# EAGLE board transceiver (2) - Copy (EAGLE 6.4), part 1 of 2
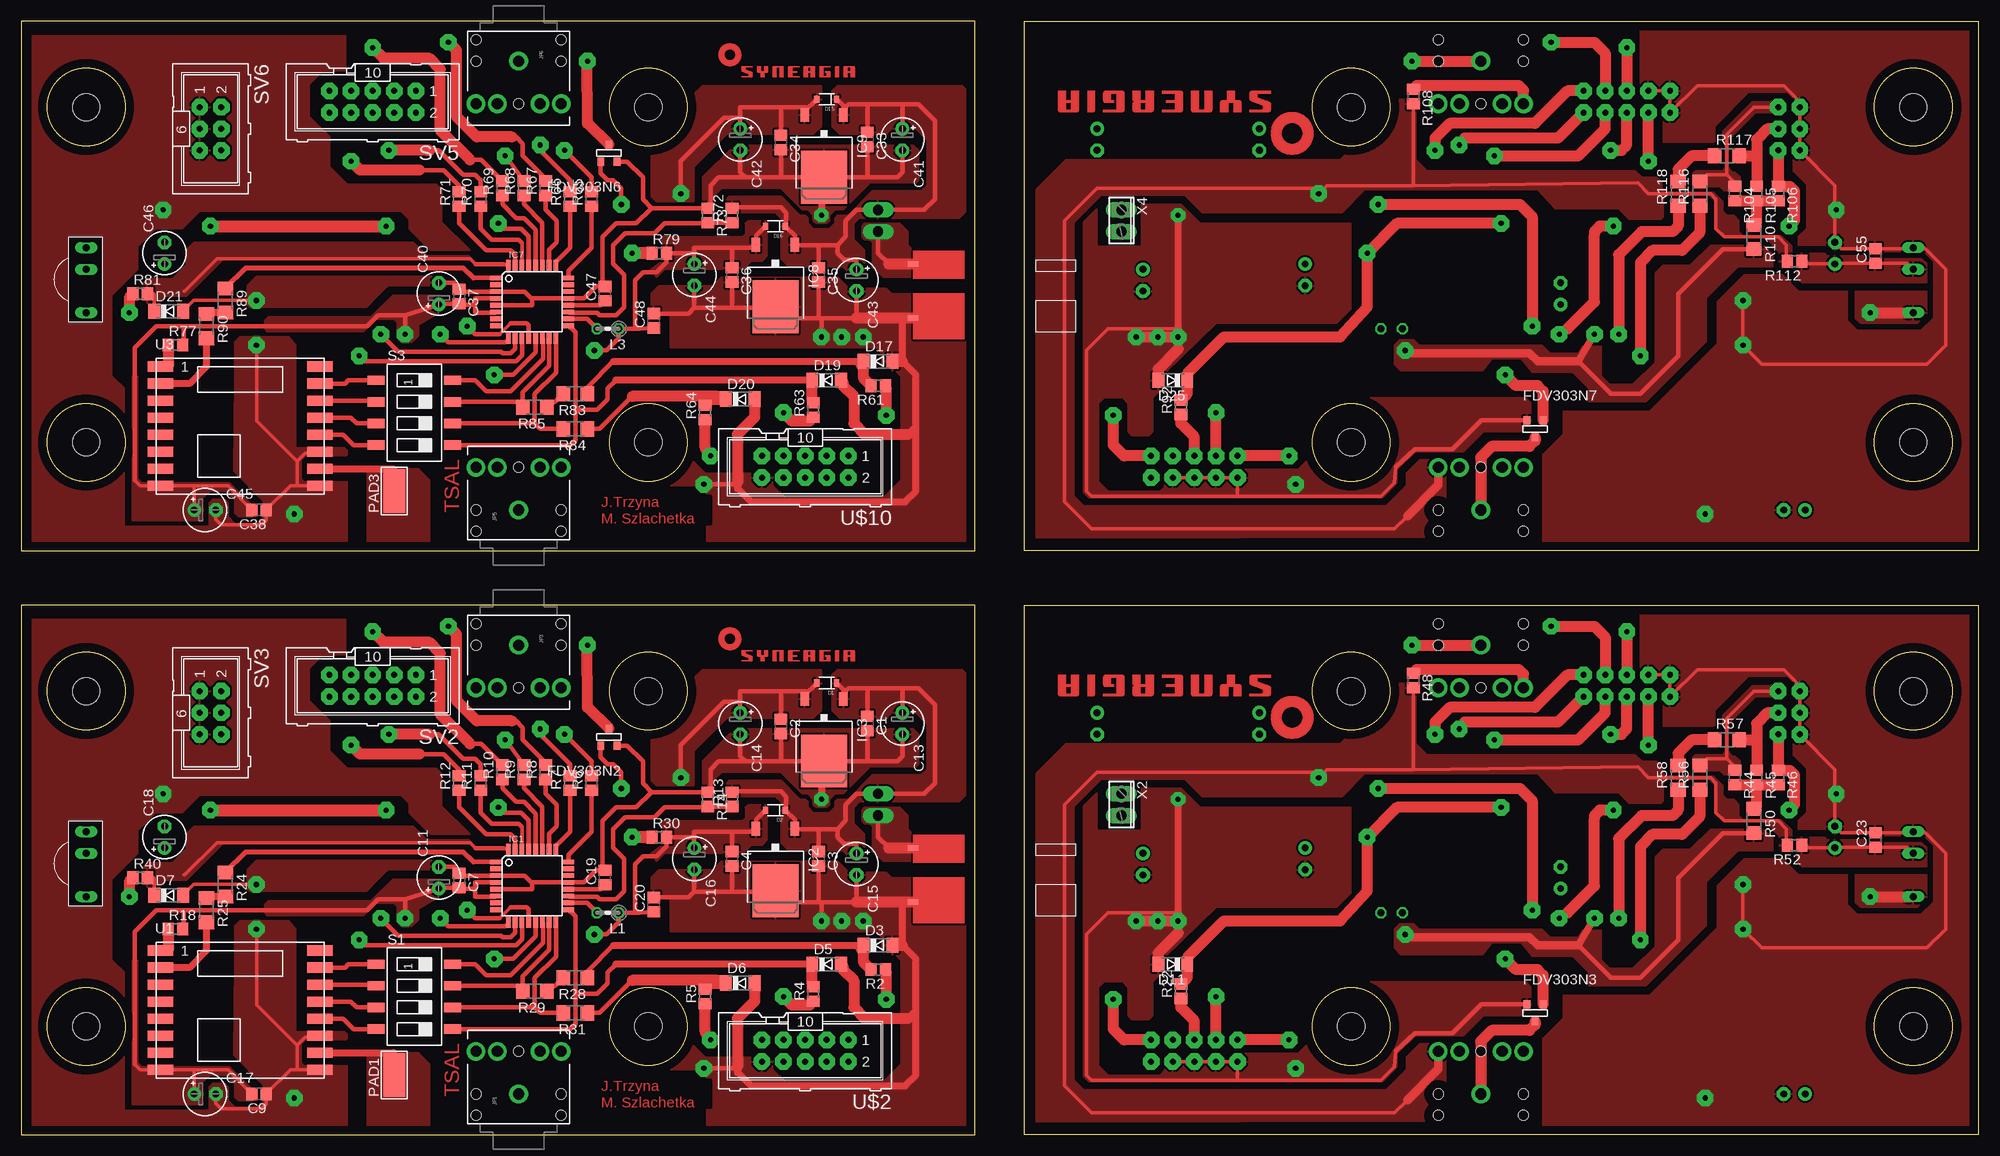
[diagram p0: board, top side]
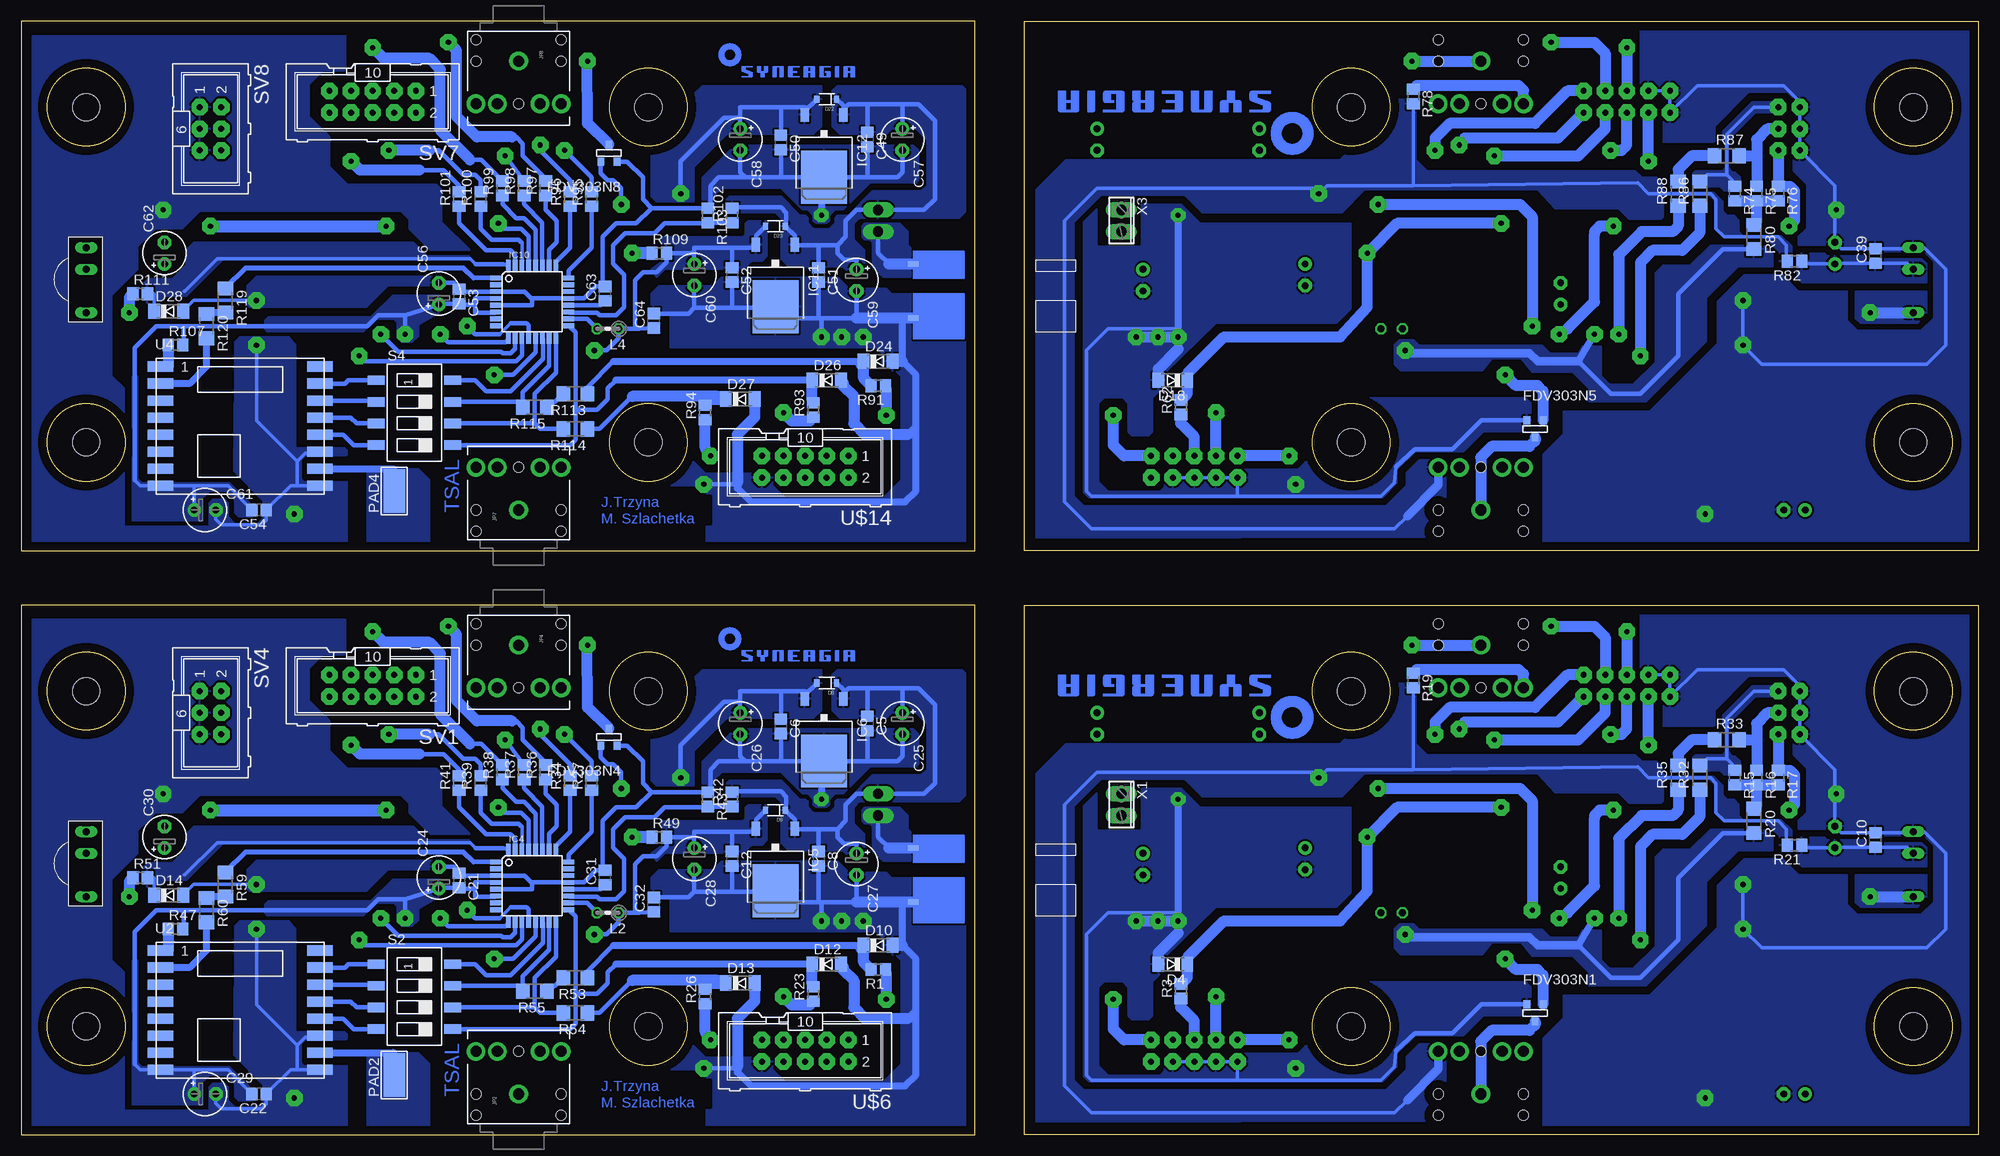
[diagram p1: board, bottom side, seen from below]

Size 229.87 x 130.73 mm. Coordinates in mm from the lower left corner, seen from the top.
Outline: 0,0 112.06,0 112.06,62.15 0,62.15 0,0
Outline: 229.87,0 117.81,0 117.81,62.15 229.87,62.15 229.87,0
Outline: 0,68.58 112.06,68.58 112.06,130.73 0,130.73 0,68.58
Outline: 229.87,68.58 117.81,68.58 117.81,130.73 229.87,130.73 229.87,68.58
Outline: circle at 73.66,52.07 radius 4.57
Outline: circle at 73.66,12.7 radius 4.57
Outline: circle at 7.62,12.7 radius 4.57
Outline: circle at 7.62,52.07 radius 4.57
Outline: circle at 156.21,52.07 radius 4.57
Outline: circle at 156.21,12.7 radius 4.57
Outline: circle at 222.25,12.7 radius 4.57
Outline: circle at 222.25,52.07 radius 4.57
Outline: circle at 73.66,120.65 radius 4.57
Outline: circle at 73.66,81.28 radius 4.57
Outline: circle at 7.62,81.28 radius 4.57
Outline: circle at 7.62,120.65 radius 4.57
Outline: circle at 156.21,120.65 radius 4.57
Outline: circle at 156.21,81.28 radius 4.57
Outline: circle at 222.25,81.28 radius 4.57
Outline: circle at 222.25,120.65 radius 4.57
Copper layers (1*16): Top 0.035mm / dielectric 1.5mm / Bottom 0.035mm
Design rules "default": minimum track width 10mil, minimum drill 24mil, track to track 8mil, track to pad 8mil, pad to pad 8mil, via to via 8mil, smd to smd 8mil, copper to edge 40mil, drill to drill 8mil, minimum pad ring 10mil, minimum via ring 8mil, stop-mask expansion 4mil, vias tented up to drill 0mil, thermal gap 10mil
Holes 3.2 mm at 7.62,52.07 7.62,12.7 73.66,12.7 73.66,52.07 222.25,52.07 222.25,12.7 156.21,12.7 156.21,52.07 7.62,120.65 7.62,81.28 73.66,81.28 73.66,120.65 222.25,120.65 222.25,81.28 156.21,81.28 156.21,120.65

## Footprints (pad centres in the part's own frame; a part is rotated, then mirrored left to right if it is on the bottom)
C0805 = smd 1.3 x 1.5: 1 -0.85,0; 2 0.85,0
E2,5-5 = drill 0.813 pad 1.6: + -1.27,0 | drill 0.813 pad 1.6 octagon: - 1.27,0
SOD-323 = smd 0.63 x 0.83: 1 -1.15,0; 2 1.15,0
SOD80C = smd 1.4 x 1.8: A 1.7,0; C -1.7,0
SOT-23 = smd 0.787 x 0.889: 1 0.025,-1.016; 2 -0.94,1.016; 3 0.991,1.016
TQFP32-08 = smd 1.27 x 0.559: 1 -4.293,2.8; 2 -4.293,2; 3 -4.293,1.2; 4 -4.293,0.4; 5 -4.293,-0.4; 6 -4.293,-1.2; 7 -4.293,-2; 8 -4.293,-2.8; 17 4.293,-2.8; 18 4.293,-2; 19 4.293,-1.2; 20 4.293,-0.4; 21 4.293,0.4; 22 4.293,1.2; 23 4.293,2; 24 4.293,2.8 | smd 0.559 x 1.27: 9 -2.8,-4.293; 10 -2,-4.293; 11 -1.2,-4.293; 12 -0.4,-4.293; 13 0.4,-4.293; 14 1.2,-4.293; 15 2,-4.293; 16 2.8,-4.293; 25 2.8,4.293; 26 2,4.293; 27 1.2,4.293; 28 0.4,4.293; 29 -0.4,4.293; 30 -1.2,4.293; 31 -2,4.293; 32 -2.8,4.293
TO252 = smd 1 x 1.6: 1 -2.28,-4.8; 2 2.28,-4.8 | smd 5.4 x 6.2: 3 0,2.5
AUDIO-JACK = drill 1.3 pad 2.184: RING 5,5; RSH 5,2.5; SLEEVE 0,0; TIP 5,-5; TSH 5,-2.5 | hole 1.2: 0,5; -2.5,5; -2.5,-5; 0,-5; 5,0
0204V = drill 0.813 octagon: 1 -1.27,0; 2 1.27,0
5-2,5 = smd 2.54 x 5.08: 1 0,0
R0805 = smd 1.3 x 1.5: 1 -0.85,0; 2 0.85,0
R1206 = smd 1.6 x 1.803: 1 -1.422,0; 2 1.422,0
SMS-004 = smd 1.092 x 2.007: 1 -3.81,-4.496; 2 -1.27,-4.496; 3 1.27,-4.496; 4 3.81,-4.496; 5 3.81,4.496; 6 1.27,4.496; 7 -1.27,4.496; 8 -3.81,4.496
ML10 = drill 0.7 pad 1.93 octagon: 1 -5.08,-1.27; 2 -5.08,1.27; 3 -2.54,-1.27; 4 -2.54,1.27; 5 0,-1.27; 6 0,1.27; 7 2.54,-1.27; 8 2.54,1.27; 9 5.08,-1.27; 10 5.08,1.27
ML6 = drill 0.7 pad 1.93 octagon: 1 -2.54,-1.27; 2 -2.54,1.27; 3 0,-1.27; 4 0,1.27; 5 2.54,-1.27; 6 2.54,1.27
TSOP17XX = drill 0.813 long: GND -3.81,0; OUT 3.81,0; V+ -1.27,0
RFM69W-XXXS2 = smd 3 x 1.2: 1 -9.35,7; 2 -9.35,5; 3 -9.35,3; 4 -9.35,1; 5 -9.35,-1; 6 -9.35,-3; 7 -9.35,-5; 8 -9.35,-7; 9 9.35,-7; 10 9.35,-5; 11 9.35,-3; 12 9.35,-1; 13 9.35,1; 14 9.35,3; 15 9.35,5; 16 9.35,7
DEANSM = smd 1.27 x 0.635: P$NEG 3.175,3.81; P$POS 3.175,-2.54
2POL254 = drill 1.2 long: 1 -1.27,0; 2 1.27,0

## Placement (x,y rotation side)
C1  100n  [C0805]  99.38,48.26 270 top
C2  100n  [C0805]  89.22,47.94 270 top
C3  100n  [C0805]  93.66,32.38 270 top
C4  100n  [C0805]  83.5,32.38 270 top
C5  100n  [C0805]  130.49,48.26 270 bottom
C6  100n  [C0805]  140.65,47.94 270 bottom
C7  100n  [C0805]  51.44,29.84 270 top
C8  100n  [C0805]  136.21,32.38 270 bottom
C9  100n  [C0805]  27.94,4.76 180 top
C10  100n  [C0805]  12.06,34.61 90 bottom
C11  22u  [E2,5-5]  49.05,30.16 90 top
C12  100n  [C0805]  146.37,32.38 270 bottom
C13  47u  [E2,5-5]  103.5,48.26 270 top
C14  47u  [E2,5-5]  84.45,48.26 270 top
C15  47u  [E2,5-5]  98.11,31.75 270 top
C16  47u  [E2,5-5]  79.06,32.38 270 top
C17  22u  [E2,5-5]  21.59,4.76 0 top
C18  4,7u  [E2,5-5]  16.83,34.92 90 top
C19  100n  [C0805]  68.58,30.16 90 top
C20  100n  [C0805]  74.3,26.99 90 top
C21  100n  [C0805]  178.44,29.84 270 bottom
C22  100n  [C0805]  201.93,4.76 180 bottom
C23  100n  [C0805]  217.81,34.61 90 top
C24  22u  [E2,5-5]  180.82,30.16 90 bottom
C25  47u  [E2,5-5]  126.36,48.26 270 bottom
C26  47u  [E2,5-5]  145.41,48.26 270 bottom
C27  47u  [E2,5-5]  131.76,31.75 270 bottom
C28  47u  [E2,5-5]  150.81,32.38 270 bottom
C29  22u  [E2,5-5]  208.28,4.76 0 bottom
C30  4,7u  [E2,5-5]  213.04,34.92 90 bottom
C31  100n  [C0805]  161.29,30.16 90 bottom
C32  100n  [C0805]  155.57,26.99 90 bottom
C33  100n  [C0805]  99.38,116.84 270 top
C34  100n  [C0805]  89.22,116.52 270 top
C35  100n  [C0805]  93.66,100.97 270 top
C36  100n  [C0805]  83.5,100.97 270 top
C37  100n  [C0805]  51.44,98.43 270 top
C38  100n  [C0805]  27.94,73.34 180 top
C39  100n  [C0805]  12.06,103.19 90 bottom
C40  22u  [E2,5-5]  49.05,98.74 90 top
C41  47u  [E2,5-5]  103.5,116.84 270 top
C42  47u  [E2,5-5]  84.45,116.84 270 top
C43  47u  [E2,5-5]  98.11,100.33 270 top
C44  47u  [E2,5-5]  79.06,100.97 270 top
C45  22u  [E2,5-5]  21.59,73.34 0 top
C46  4,7u  [E2,5-5]  16.83,103.51 90 top
C47  100n  [C0805]  68.58,98.74 90 top
C48  100n  [C0805]  74.3,95.57 90 top
C49  100n  [C0805]  130.49,116.84 270 bottom
C50  100n  [C0805]  140.65,116.52 270 bottom
C51  100n  [C0805]  136.21,100.97 270 bottom
C52  100n  [C0805]  146.37,100.97 270 bottom
C53  100n  [C0805]  178.44,98.43 270 bottom
C54  100n  [C0805]  201.93,73.34 180 bottom
C55  100n  [C0805]  217.81,103.19 90 top
C56  22u  [E2,5-5]  180.82,98.74 90 bottom
C57  47u  [E2,5-5]  126.36,116.84 270 bottom
C58  47u  [E2,5-5]  145.41,116.84 270 bottom
C59  47u  [E2,5-5]  131.76,100.33 270 bottom
C60  47u  [E2,5-5]  150.81,100.97 270 bottom
C61  22u  [E2,5-5]  208.28,73.34 0 bottom
C62  4,7u  [E2,5-5]  213.04,103.51 90 bottom
C63  100n  [C0805]  161.29,98.74 90 bottom
C64  100n  [C0805]  155.57,95.57 90 bottom
D1  BAS16HT1G  [SOD-323]  94.61,53.02 180 top
D2  BAS16HT1G  [SOD-323]  88.58,38.1 180 top
D3  [SOD80C]  100.65,22.22 0 top
D4  [SOD80C]  94.61,20 180 bottom
D5  [SOD80C]  94.61,20 0 top
D6  [SOD80C]  84.45,17.78 0 top
D7  [SOD80C]  17.3,28.1 0 top
D8  BAS16HT1G  [SOD-323]  135.25,53.02 180 bottom
D9  BAS16HT1G  [SOD-323]  141.29,38.1 180 bottom
D10  [SOD80C]  129.22,22.22 0 bottom
D11  [SOD80C]  135.25,20 180 top
D12  [SOD80C]  135.25,20 0 bottom
D13  [SOD80C]  145.41,17.78 0 bottom
D14  [SOD80C]  212.57,28.1 0 bottom
D15  BAS16HT1G  [SOD-323]  94.61,121.6 180 top
D16  BAS16HT1G  [SOD-323]  88.58,106.68 180 top
D17  [SOD80C]  100.65,90.81 0 top
D18  [SOD80C]  94.61,88.58 180 bottom
D19  [SOD80C]  94.61,88.58 0 top
D20  [SOD80C]  84.45,86.36 0 top
D21  [SOD80C]  17.3,96.68 0 top
D22  BAS16HT1G  [SOD-323]  135.25,121.6 180 bottom
D23  BAS16HT1G  [SOD-323]  141.29,106.68 180 bottom
D24  [SOD80C]  129.22,90.81 0 bottom
D25  [SOD80C]  135.25,88.58 180 top
D26  [SOD80C]  135.25,88.58 0 bottom
D27  [SOD80C]  145.41,86.36 0 bottom
D28  [SOD80C]  212.57,96.68 0 bottom
FDV303N1  [SOT-23]  52.07,14.29 0 bottom
FDV303N2  [SOT-23]  69.06,46.67 180 top
FDV303N3  [SOT-23]  177.8,14.29 0 top
FDV303N4  [SOT-23]  160.81,46.67 180 bottom
FDV303N5  [SOT-23]  52.07,82.87 0 bottom
FDV303N6  [SOT-23]  69.06,115.25 180 top
FDV303N7  [SOT-23]  177.8,82.87 0 top
FDV303N8  [SOT-23]  160.81,115.25 180 bottom
IC1  MEGA8-AI  [TQFP32-08]  60.01,29.21 0 top
IC2  LF33  [TO252]  88.58,31.11 180 top
IC3  LF50  [TO252]  94.3,46.35 180 top
IC4  MEGA8-AI  [TQFP32-08]  169.86,29.21 0 bottom
IC5  LF33  [TO252]  141.29,31.11 180 bottom
IC6  LF50  [TO252]  135.57,46.35 180 bottom
IC7  MEGA8-AI  [TQFP32-08]  60.01,97.79 0 top
IC8  LF33  [TO252]  88.58,99.7 180 top
IC9  LF50  [TO252]  94.3,114.94 180 top
IC10  MEGA8-AI  [TQFP32-08]  169.86,97.79 0 bottom
IC11  LF33  [TO252]  141.29,99.7 180 bottom
IC12  LF50  [TO252]  135.57,114.94 180 bottom
JP1  [AUDIO-JACK]  58.42,4.76 90 top
JP2  [AUDIO-JACK]  171.45,4.76 90 bottom
JP3  [AUDIO-JACK]  58.42,57.47 270 top
JP4  [AUDIO-JACK]  171.45,57.47 270 bottom
JP5  [AUDIO-JACK]  58.42,73.34 90 top
JP6  [AUDIO-JACK]  58.42,126.05 270 top
JP7  [AUDIO-JACK]  171.45,73.34 90 bottom
JP8  [AUDIO-JACK]  171.45,126.05 270 bottom
L1  [0204V]  68.9,26.04 180 top
L2  [0204V]  160.97,26.04 180 bottom
L3  [0204V]  68.9,94.62 180 top
L4  [0204V]  160.97,94.62 180 bottom
PAD1  WIREPADSMD5-2,5  [5-2,5]  43.81,6.99 0 top
PAD2  WIREPADSMD5-2,5  [5-2,5]  186.06,6.99 0 bottom
PAD3  WIREPADSMD5-2,5  [5-2,5]  43.81,75.57 0 top
PAD4  WIREPADSMD5-2,5  [5-2,5]  186.06,75.57 0 bottom
R1  330k  [R0805]  129.22,19.37 180 bottom
R2  330k  [R0805]  100.65,19.37 180 top
R3  330k  [R0805]  93.66,16.83 90 bottom
R4  330k  [R0805]  93.03,16.51 90 top
R5  330k  [R0805]  80.33,16.19 90 top
R6  1.2k  [R0805]  66.99,41.27 90 top
R7  1.2k  [R0805]  64.45,41.27 90 top
R8  1.2k  [R0805]  61.59,42.55 90 top
R9  1.2k  [R0805]  59.05,42.55 90 top
R10  1.2k  [R0805]  56.52,42.55 90 top
R11  1,2k  [R0805]  53.98,41.27 90 top
R12  1.2k  [R0805]  51.44,41.27 90 top
R13  10k  [R0805]  83.5,39.37 90 top
R14  3,6k  [R0805]  80.64,39.37 270 top
R15  10k  [R0805]  28.57,41.91 270 bottom
R16  10k  [R0805]  26.04,41.91 270 bottom
R17  10k  [R0805]  23.5,41.91 270 bottom
R18  10k  [R0805]  18.1,24.13 0 top
R19  [R0805]  66.36,53.34 270 bottom
R20  0R  [R1206]  26.35,36.83 270 bottom
R21  220R  [R0805]  21.59,33.97 180 bottom
R22  330k  [R0805]  136.21,16.83 90 top
R23  330k  [R0805]  136.84,16.51 90 bottom
R24  0R  [R1206]  23.97,29.37 270 top
R25  0R  [R1206]  21.75,26.35 270 top
R26  330k  [R0805]  149.54,16.19 90 bottom
R27  1.2k  [R0805]  162.88,41.27 90 bottom
R28  0R  [R1206]  65.09,18.41 180 top
R29  0R  [R1206]  60.33,16.83 180 top
R30  10k  [R0805]  74.93,34.92 0 top
R31  0R  [R1206]  65.09,14.29 180 top
R32  0R  [R1206]  32.7,41.91 90 bottom
R33  0R  [R1206]  29.53,46.35 0 bottom
R34  1.2k  [R0805]  165.42,41.27 90 bottom
R35  0R  [R1206]  35.24,41.91 90 bottom
R36  1.2k  [R0805]  168.28,42.55 90 bottom
R37  1.2k  [R0805]  170.81,42.55 90 bottom
R38  1.2k  [R0805]  173.35,42.55 90 bottom
R39  1,2k  [R0805]  175.9,41.27 90 bottom
R40  220R  [R0805]  13.97,30.16 0 top
R41  1.2k  [R0805]  178.44,41.27 90 bottom
R42  10k  [R0805]  146.37,39.37 90 bottom
R43  3,6k  [R0805]  149.22,39.37 270 bottom
R44  10k  [R0805]  201.29,41.91 270 top
R45  10k  [R0805]  203.84,41.91 270 top
R46  10k  [R0805]  206.38,41.91 270 top
R47  10k  [R0805]  211.77,24.13 0 bottom
R48  [R0805]  163.51,53.34 270 top
R49  10k  [R0805]  154.94,34.92 0 bottom
R50  0R  [R1206]  203.52,36.83 270 top
R51  220R  [R0805]  215.9,30.16 0 bottom
R52  220R  [R0805]  208.28,33.97 180 top
R53  0R  [R1206]  164.78,18.41 180 bottom
R54  0R  [R1206]  164.78,14.29 180 bottom
R55  0R  [R1206]  169.54,16.83 180 bottom
R56  0R  [R1206]  197.17,41.91 90 top
R57  0R  [R1206]  200.34,46.35 0 top
R58  0R  [R1206]  194.63,41.91 90 top
R59  0R  [R1206]  205.9,29.37 270 bottom
R60  0R  [R1206]  208.12,26.35 270 bottom
R61  330k  [R0805]  100.65,87.95 180 top
R62  330k  [R0805]  93.66,85.41 90 bottom
R63  330k  [R0805]  93.03,85.09 90 top
R64  330k  [R0805]  80.33,84.77 90 top
R65  1.2k  [R0805]  66.99,109.86 90 top
R66  1.2k  [R0805]  64.45,109.86 90 top
R67  1.2k  [R0805]  61.59,111.12 90 top
R68  1.2k  [R0805]  59.05,111.12 90 top
R69  1.2k  [R0805]  56.52,111.12 90 top
R70  1,2k  [R0805]  53.98,109.86 90 top
R71  1.2k  [R0805]  51.44,109.86 90 top
R72  10k  [R0805]  83.5,107.95 90 top
R73  3,6k  [R0805]  80.64,107.95 270 top
R74  10k  [R0805]  28.57,110.49 270 bottom
R75  10k  [R0805]  26.04,110.49 270 bottom
R76  10k  [R0805]  23.5,110.49 270 bottom
R77  10k  [R0805]  18.1,92.71 0 top
R78  [R0805]  66.36,121.92 270 bottom
R79  10k  [R0805]  74.93,103.51 0 top
R80  0R  [R1206]  26.35,105.41 270 bottom
R81  220R  [R0805]  13.97,98.74 0 top
R82  220R  [R0805]  21.59,102.55 180 bottom
R83  0R  [R1206]  65.09,87 180 top
R84  0R  [R1206]  65.09,82.87 180 top
R85  0R  [R1206]  60.33,85.41 180 top
R86  0R  [R1206]  32.7,110.49 90 bottom
R87  0R  [R1206]  29.53,114.94 0 bottom
R88  0R  [R1206]  35.24,110.49 90 bottom
R89  0R  [R1206]  23.97,97.95 270 top
R90  0R  [R1206]  21.75,94.93 270 top
R91  330k  [R0805]  129.22,87.95 180 bottom
R92  330k  [R0805]  136.21,85.41 90 top
R93  330k  [R0805]  136.84,85.09 90 bottom
R94  330k  [R0805]  149.54,84.77 90 bottom
R95  1.2k  [R0805]  162.88,109.86 90 bottom
R96  1.2k  [R0805]  165.42,109.86 90 bottom
R97  1.2k  [R0805]  168.28,111.12 90 bottom
R98  1.2k  [R0805]  170.81,111.12 90 bottom
R99  1.2k  [R0805]  173.35,111.12 90 bottom
R100  1,2k  [R0805]  175.9,109.86 90 bottom
R101  1.2k  [R0805]  178.44,109.86 90 bottom
R102  10k  [R0805]  146.37,107.95 90 bottom
R103  3,6k  [R0805]  149.22,107.95 270 bottom
R104  10k  [R0805]  201.29,110.49 270 top
R105  10k  [R0805]  203.84,110.49 270 top
R106  10k  [R0805]  206.38,110.49 270 top
R107  10k  [R0805]  211.77,92.71 0 bottom
R108  [R0805]  163.51,121.92 270 top
R109  10k  [R0805]  154.94,103.51 0 bottom
R110  0R  [R1206]  203.52,105.41 270 top
R111  220R  [R0805]  215.9,98.74 0 bottom
R112  220R  [R0805]  208.28,102.55 180 top
R113  0R  [R1206]  164.78,87 180 bottom
R114  0R  [R1206]  164.78,82.87 180 bottom
R115  0R  [R1206]  169.54,85.41 180 bottom
R116  0R  [R1206]  197.17,110.49 90 top
R117  0R  [R1206]  200.34,114.94 0 top
R118  0R  [R1206]  194.63,110.49 90 top
R119  0R  [R1206]  205.9,97.95 270 bottom
R120  0R  [R1206]  208.12,94.93 270 bottom
S1  SWS004  [SMS-004]  46.2,16.19 270 top
S2  SWS004  [SMS-004]  183.67,16.19 270 bottom
S3  SWS004  [SMS-004]  46.2,84.77 270 top
S4  SWS004  [SMS-004]  183.67,84.77 270 bottom
SV1  [ML10]  188.59,52.7 180 bottom
SV2  [ML10]  41.27,52.7 180 top
SV3  [ML6]  22.23,49.53 270 top
SV4  [ML6]  207.65,49.53 270 bottom
SV5  [ML10]  41.27,121.29 180 top
SV6  [ML6]  22.23,118.11 270 top
SV7  [ML10]  188.59,121.29 180 bottom
SV8  [ML6]  207.65,118.11 270 bottom
TSOP  TSOP1736  [TSOP17XX]  7.62,31.75 270 top
TSOP1  TSOP1736  [TSOP17XX]  222.25,31.75 270 bottom
TSOP2  TSOP1736  [TSOP17XX]  7.62,100.33 270 top
TSOP3  TSOP1736  [TSOP17XX]  222.25,100.33 270 bottom
U1  RFM69HW  [RFM69W-XXXS2]  25.72,14.61 0 top
U2  RFM69HW  [RFM69W-XXXS2]  204.15,14.61 0 bottom
U3  RFM69HW  [RFM69W-XXXS2]  25.72,83.19 0 top
U4  RFM69HW  [RFM69W-XXXS2]  204.15,83.19 0 bottom
U$1  DEANS.MALE  [DEANSM]  107.95,31.11 180 top
U$2  [ML10]  92.08,9.84 180 top
U$3  [SYNERGIA_16MM]  81.92,55.56 0 top
U$4  [SYNERGIA_30MM]  78.11,53.98 180 bottom
U$5  DEANS.MALE  [DEANSM]  121.92,31.11 180 bottom
U$6  [ML10]  137.79,9.84 180 bottom
U$7  [SYNERGIA_16MM]  147.96,55.56 0 bottom
U$8  [SYNERGIA_30MM]  151.76,53.98 180 top
U$9  DEANS.MALE  [DEANSM]  107.95,99.7 180 top
U$10  [ML10]  92.08,78.42 180 top
U$11  [SYNERGIA_16MM]  81.92,124.14 0 top
U$12  [SYNERGIA_30MM]  78.11,122.56 180 bottom
U$13  DEANS.MALE  [DEANSM]  121.92,99.7 180 bottom
U$14  [ML10]  137.79,78.42 180 bottom
U$15  [SYNERGIA_16MM]  147.96,124.14 0 bottom
U$16  [SYNERGIA_30MM]  151.76,122.56 180 top
X1  [2POL254]  100.65,38.73 270 bottom
X2  [2POL254]  129.22,38.73 270 top
X3  [2POL254]  100.65,107.32 270 bottom
X4  [2POL254]  129.22,107.32 270 top

## Library data of the parts
C1-C10 C12 C19-C23 C31-C39 C47-C55 C63 C64 L1-L4 R1-R19 R21-R23 R26 R27 R30 R34 R36-R49 R51 R52 R61-R79 R81 R82 R91-R109 R111 R112 = resistor
C11 C13-C18 C24-C30 C40-C46 C56-C62 R20 R24 R25 R28 R29 R31-R33 R35 R50 R53-R60 R80 R83-R90 R110 R113-R120 = rcl
D1 D2 D8 D9 D15 D16 D22 D23 = SparkFun
D3-D7 D10-D14 D17-D21 D24-D28 = diode
FDV303N1-FDV303N8 = zetex; OC_FARNELL: unknown; OC_NEWARK: unknown
IC1 IC4 IC7 IC10 = atmel; MPN: ATMEGA8-16AU; OC_FARNELL: 9171371; OC_NEWARK: 73M8863
IC2 IC3 IC5 IC6 IC8 IC9 IC11 IC12 = linear
JP1-JP8 = SparkFun-Connectors
PAD1-PAD4 = wirepad
S1-S4 = smd-special
SV1-SV8 U$2 U$6 U$10 U$14 = con-harting-ml; OC_FARNELL: unknown; OC_NEWARK: unknown
TSOP TSOP1-TSOP3 = tsop
U1-U4 = SparkFun-RF
U$1 U$5 U$9 U$13 = bt_electromech
U$3 U$4 U$7 U$8 U$11 U$12 U$15 U$16 = synergia_logo
X1-X4 = con-phoenix-254; OC_FARNELL: unknown; OC_NEWARK: unknown

## Nets
+3V1: C12.1 C21.2 C22.2 C24.+ C28.+ C29.+ C32.1 D9.2 IC4.4 IC4.6 IC5.2 L2.1 R47.2 R49.2 R50.2 U2.8
+3V2: C36.1 C37.2 C38.2 C40.+ C44.+ C45.+ C48.1 D16.2 IC7.4 IC7.6 IC8.2 L3.1 R77.2 R79.2 R80.2 U3.8
+3V3: C4.1 C7.2 C9.2 C11.+ C16.+ C17.+ C20.1 D2.2 IC1.4 IC1.6 IC2.2 L1.1 R18.2 R20.2 R30.2 U1.8
+3V4: C52.1 C53.2 C54.2 C56.+ C60.+ C61.+ C64.1 D23.2 IC10.4 IC10.6 IC11.2 L4.1 R107.2 R109.2 R110.2 U4.8
+5V: C2.1 C14.+ D1.2 IC3.2 JP1.TIP R19.2 R21.2
+5V1: C6.1 C26.+ D8.2 IC6.2 JP2.TIP R48.2 R52.2
+5V2: C34.1 C42.+ D15.2 IC9.2 JP5.TIP R78.2 R82.2
+5V3: C50.1 C58.+ D22.2 IC12.2 JP7.TIP R108.2 R112.2
ADC: IC1.19 R13.1 R14.2
ADC1: IC4.19 R42.1 R43.2
ADC2: IC7.19 R72.1 R73.2
ADC3: IC10.19 R102.1 R103.2
DIO0: IC1.1 R24.1
DIO1: IC4.1 R59.1
DIO2: IC7.1 R89.1
DIO3: IC10.1 R119.1
GND: C1.2 C2.2 C3.2 C4.2 C7.1 C9.1 C10.2 C11.- C13.- C14.- C15.- C16.- C17.- C18.- C19.2 C20.2 D3.A D4.A D5.A D6.A D7.A FDV303N1.2 FDV303N2.2 IC1.3 IC1.5 IC1.21 IC2.3 IC3.3 R14.1 SV2.7 SV2.9 SV2.10 SV3.1 SV3.3 SV3.5 TSOP.GND U1.9 U1.11 U$1.P$NEG U$2.4 U$2.6 U$2.8 U$2.10
GND1: C5.2 C6.2 C8.2 C12.2 C21.1 C22.1 C23.2 C24.- C25.- C26.- C27.- C28.- C29.- C30.- C31.2 C32.2 D10.A D11.A D12.A D13.A D14.A FDV303N3.2 FDV303N4.2 IC4.3 IC4.5 IC4.21 IC5.3 IC6.3 R43.1 SV1.7 SV1.9 SV1.10 SV4.1 SV4.3 SV4.5 TSOP1.GND U2.9 U2.11 U$5.P$NEG U$6.4 U$6.6 U$6.8 U$6.10
GND2: C33.2 C34.2 C35.2 C36.2 C37.1 C38.1 C39.2 C40.- C41.- C42.- C43.- C44.- C45.- C46.- C47.2 C48.2 D17.A D18.A D19.A D20.A D21.A FDV303N5.2 FDV303N6.2 IC7.3 IC7.5 IC7.21 IC8.3 IC9.3 R73.1 SV5.7 SV5.9 SV5.10 SV6.1 SV6.3 SV6.5 TSOP2.GND U3.9 U3.11 U$9.P$NEG U$10.4 U$10.6 U$10.8 U$10.10
GND3: C49.2 C50.2 C51.2 C52.2 C53.1 C54.1 C55.2 C56.- C57.- C58.- C59.- C60.- C61.- C62.- C63.2 C64.2 D24.A D25.A D26.A D27.A D28.A FDV303N7.2 FDV303N8.2 IC10.3 IC10.5 IC10.21 IC11.3 IC12.3 R103.1 SV7.7 SV7.9 SV7.10 SV8.1 SV8.3 SV8.5 TSOP3.GND U4.9 U4.11 U$13.P$NEG U$14.4 U$14.6 U$14.8 U$14.10
LED1: IC1.24 R6.1
LED2: IC1.25 R7.1
LED3: IC1.26 R8.1
LED4: IC1.27 R9.1
LED5: IC1.28 R10.1
LED6: IC4.24 R27.1
LED7: IC4.25 R34.1
LED8: IC4.26 R36.1
LED9: IC4.27 R37.1
LED10: IC4.28 R38.1
LED11: IC7.24 R65.1
LED12: IC7.25 R66.1
LED13: IC7.26 R67.1
LED14: IC7.27 R68.1
LED15: IC7.28 R69.1
LED16: IC10.24 R95.1
LED17: IC10.25 R96.1
LED18: IC10.26 R97.1
LED19: IC10.27 R98.1
LED20: IC10.28 R99.1
LED_BATT_GR: IC1.30 R11.1
LED_BATT_GR1: IC4.30 R39.1
LED_BATT_GR2: IC7.30 R70.1
LED_BATT_GR3: IC10.30 R100.1
LED_BATT_RED: IC1.31 R12.1
LED_BATT_RED1: IC4.31 R41.1
LED_BATT_RED2: IC7.31 R71.1
LED_BATT_RED3: IC10.31 R101.1
LED_STRIPE: FDV303N2.3 IC1.12
LED_STRIPE1: FDV303N4.3 IC4.12
LED_STRIPE2: FDV303N6.3 IC7.12
LED_STRIPE3: FDV303N8.3 IC10.12
MISO: IC1.16 R31.2 S1.6
MISO1: IC4.16 R54.2 S2.6
MISO2: IC7.16 R84.2 S3.6
MISO3: IC10.16 R114.2 S4.6
MOSI: IC1.15 R29.2 S1.7
MOSI1: IC4.15 R55.2 S2.7
MOSI2: IC7.15 R85.2 S3.7
MOSI3: IC10.15 R115.2 S4.7
N$1: R40.1 TSOP.OUT
N$2: IC1.18 L1.2
N$3: R1.1 U$6.1
N$4: R2.1 U$2.1
N$5: R3.1 U$2.5
N$6: R4.1 U$2.7
N$7: R5.1 U$2.9
N$8: R22.1 U$6.5
N$9: R6.2 SV2.1
N$10: R7.2 SV2.2
N$11: R8.2 SV2.3
N$12: R9.2 SV2.4
N$13: R10.2 SV2.5
N$14: FDV303N1.1 JP1.SLEEVE
N$15: FDV303N2.1 JP3.SLEEVE
N$16: R11.2 SV2.6
N$17: R12.2 SV2.8
N$19: U$1.P$POS X1.2
N$20: JP3.TIP R19.1
N$21: R18.1 U1.1
N$22: R23.1 U$6.7
N$23: R15.2 R16.2 R17.2 R20.1
N$24: R24.2 R25.1
N$25: C10.1 C18.+ R21.1 TSOP.V+
N$26: C19.1 IC1.20
N$27: C1.1 C3.1 C13.+ C15.+ D1.1 D2.1 IC2.1 IC3.1 R13.2 X1.1
N$28: PAD1.1 U1.10
N$29: R28.2 R29.1
N$30: D3.C R2.2 R28.1
N$31: D6.C R5.2 R31.1
N$32: R15.1 R32.2 SV3.2
N$33: R16.1 R33.2 SV3.4
N$35: R33.1 R35.2
N$36: S1.3 U1.13
N$37: S1.2 U1.14
N$38: S1.4 U1.12
N$39: S1.1 U1.15
N$40: R26.1 U$6.9
N$41: R47.1 U2.1
N$42: C5.1 C8.1 C25.+ C27.+ D8.1 D9.1 IC5.1 IC6.1 R42.2 X2.1
N$43: IC4.18 L2.2
N$44: C31.1 IC4.20
N$45: R25.2 U1.2
N$46: PAD2.1 U2.10
N$47: R27.2 SV1.1
N$48: R34.2 SV1.2
N$49: R36.2 SV1.3
N$50: R37.2 SV1.4
N$51: R38.2 SV1.5
N$52: R39.2 SV1.6
N$53: R41.2 SV1.8
N$55: U$5.P$POS X2.2
N$56: FDV303N3.1 JP2.SLEEVE
N$57: FDV303N4.1 JP4.SLEEVE
N$58: JP4.TIP R48.1
N$59: R51.1 TSOP1.OUT
N$60: C23.1 C30.+ R52.1 TSOP1.V+
N$61: R44.2 R45.2 R46.2 R50.1
N$62: D10.C R1.2 R53.1
N$63: D13.C R26.2 R54.1
N$64: R53.2 R55.1
N$65: R44.1 R56.2 SV4.2
N$66: R45.1 R57.2 SV4.4
N$67: R57.1 R58.2
N$69: S2.1 U2.15
N$70: S2.2 U2.14
N$71: S2.3 U2.13
N$72: S2.4 U2.12
N$73: R59.2 R60.1
N$74: R60.2 U2.2
N$75: R61.1 U$10.1
N$76: R62.1 U$10.5
N$77: R63.1 U$10.7
N$78: R64.1 U$10.9
N$79: R77.1 U3.1
N$80: C33.1 C35.1 C41.+ C43.+ D15.1 D16.1 IC8.1 IC9.1 R72.2 X3.1
N$81: IC7.18 L3.2
N$82: C47.1 IC7.20
N$83: PAD3.1 U3.10
N$84: R65.2 SV5.1
N$85: R66.2 SV5.2
N$86: R67.2 SV5.3
N$87: R68.2 SV5.4
N$88: R69.2 SV5.5
N$89: R70.2 SV5.6
N$90: R71.2 SV5.8
N$92: U$9.P$POS X3.2
N$93: FDV303N5.1 JP5.SLEEVE
N$94: FDV303N6.1 JP6.SLEEVE
N$95: JP6.TIP R78.1
N$96: R81.1 TSOP2.OUT
N$97: C39.1 C46.+ R82.1 TSOP2.V+
N$98: R74.2 R75.2 R76.2 R80.1
N$99: D17.C R61.2 R83.1
N$100: D20.C R64.2 R84.1
N$101: R83.2 R85.1
N$102: R74.1 R86.2 SV6.2
N$103: R75.1 R87.2 SV6.4
N$104: R87.1 R88.2
N$106: S3.1 U3.15
N$107: S3.2 U3.14
N$108: S3.3 U3.13
N$109: S3.4 U3.12
N$110: R89.2 R90.1
N$111: R90.2 U3.2
N$112: R91.1 U$14.1
N$113: R92.1 U$14.5
N$114: R93.1 U$14.7
N$115: R94.1 U$14.9
N$116: R107.1 U4.1
N$117: C49.1 C51.1 C57.+ C59.+ D22.1 D23.1 IC11.1 IC12.1 R102.2 X4.1
N$118: IC10.18 L4.2
N$119: C63.1 IC10.20
N$120: PAD4.1 U4.10
N$121: R95.2 SV7.1
N$122: R96.2 SV7.2
N$123: R97.2 SV7.3
N$124: R98.2 SV7.4
N$125: R99.2 SV7.5
N$126: R100.2 SV7.6
N$127: R101.2 SV7.8
N$129: U$13.P$POS X4.2
N$130: FDV303N7.1 JP7.SLEEVE
N$131: FDV303N8.1 JP8.SLEEVE
N$132: JP8.TIP R108.1
N$133: R111.1 TSOP3.OUT
N$134: C55.1 C62.+ R112.1 TSOP3.V+
N$135: R104.2 R105.2 R106.2 R110.1
N$136: D24.C R91.2 R113.1
N$137: D27.C R94.2 R114.1
N$138: R113.2 R115.1
N$139: R104.1 R116.2 SV8.2
N$140: R105.1 R117.2 SV8.4
N$141: R117.1 R118.2
N$143: S4.1 U4.15
N$144: S4.2 U4.14
N$145: S4.3 U4.13
N$146: S4.4 U4.12
N$147: R119.2 R120.1
N$148: R120.2 U4.2
RESET: D4.C IC1.29 R3.2 R30.1
RESET1: D11.C IC4.29 R22.2 R49.1
RESET2: D18.C IC7.29 R62.2 R79.1
RESET3: D25.C IC10.29 R92.2 R109.1
SCK: D5.C IC1.17 R4.2 S1.5
SCK1: D12.C IC4.17 R23.2 S2.5
SCK2: D19.C IC7.17 R63.2 S3.5
SCK3: D26.C IC10.17 R93.2 S4.5
SS: IC1.14 S1.8
SS1: IC4.14 S2.8
SS2: IC7.14 S3.8
SS3: IC10.14 S4.8
SWITCH_DOWN: IC1.11 R32.1
SWITCH_DOWN1: IC4.11 R56.1
SWITCH_DOWN2: IC7.11 R86.1
SWITCH_DOWN3: IC10.11 R116.1
SWITCH_OK: IC1.10 R35.1
SWITCH_OK1: IC4.10 R58.1
SWITCH_OK2: IC7.10 R88.1
SWITCH_OK3: IC10.10 R118.1
SWITCH_UP: IC1.9 R17.1 SV3.6
SWITCH_UP1: IC4.9 R46.1 SV4.6
SWITCH_UP2: IC7.9 R76.1 SV6.6
SWITCH_UP3: IC10.9 R106.1 SV8.6
TSAL_ENABLE: FDV303N1.3 IC1.13
TSAL_ENABLE1: FDV303N3.3 IC4.13
TSAL_ENABLE2: FDV303N5.3 IC7.13
TSAL_ENABLE3: FDV303N7.3 IC10.13
TSOP_OUT: D7.C IC1.32 R40.2
TSOP_OUT1: D14.C IC4.32 R51.2
TSOP_OUT2: D21.C IC7.32 R81.2
TSOP_OUT3: D28.C IC10.32 R111.2

## Tracks (layer width: path | path; a pad name or v marks a point on that pad's centre or on a via)
+3V1  (via drill 0.6 pad 1.93)
  Top 0.508: R50.2 199.87,35.41 194.63,30.16 194.63,22.86 190.18,18.41 186.69,18.41 182.88,22.22
  Top 0.813: 182.88,22.22 v184.78,25.4
  Top 1.016: 182.88,22.22 178.12,22.22 177.16,23.18 162.88,23.18 v162.56,23.49
  Bottom 0.406: 216.53,8.25 215.9,7.62 214,7.61 U2.8 212.53,7.62 209.55,7.62 | C22.2 202.78,4.82 205.58,7.62 209.55,7.62 | C29.+ 209.55,7.62
  Bottom 0.508: 146.37,35.56 143.92,35.56 IC5.2 143.57,36.97 D9.2 | 146.37,35.56 150.81,35.56 150.81,34.92 | C12.1 146.37,35.56 | 150.81,34.92 R49.2 154.09,33.87 155.26,32.7 156.84,32.7 157.8,31.75 157.8,26.04 | 150.81,34.92 C28.+ | 210.82,26.35 189.23,26.35 187.96,27.62 184.78,27.62 | R47.2 210.82,24.23 210.82,26.35 | 210.82,26.35 214,26.35 216.53,23.81 216.53,8.25 | IC4.6 174.22,27.94 176.53,27.94 176.53,28.89 | IC4.4 176.53,29.61 176.53,28.89 | 184.78,27.62 C24.+ 180.44,28.99 C21.2 178.33,28.89 176.53,28.89 | v184.78,25.4 184.78,27.62 | 157.8,26.04 L2.1 159.7,24.92 161.13,23.49 v162.56,23.49 | 157.8,26.04 157.26,26.04 C32.1
  pour Bottom: 142.24,38.73 144.46,38.73 144.78,38.42 144.78,37.15 145.1,36.83 154.62,36.83 154.62,33.97 155.89,33.02 155.26,32.07 154.31,33.02 145.1,33.02 144.15,33.97 142.88,33.97 142.24,34.61
  pour Bottom: 180.66,30 186.21,30 188.75,27.46 200.82,27.46 201.29,26.99 201.29,26.04 200.98,25.72 189.71,25.72 188.28,27.15 186.06,27.15 185.74,26.83 185.74,25.08 185.1,24.45 183.99,24.45 183.2,25.24 183.2,26.51 180.02,28.42 180.02,29.37
  pour Top: 198.44,35.88 204.63,35.88 205.74,34.77 205.74,33.34 201.61,33.34 197.96,29.69 197.96,24.61 190.82,17.46 184.15,17.46 184.15,19.05 182.25,20.95 177.48,20.95 176.21,22.54 172.72,22.54 171.61,21.11 162.08,21.11 161.29,21.91 161.29,24.13 161.93,24.77 163.51,24.77 164.15,24.13 178.59,24.13 179.55,23.18 182.88,23.18 183.36,23.97 185.58,23.97 185.58,20.48 186.53,19.53 189.39,19.53 191.93,22.07 191.93,32.54 192.88,33.5 196.06,33.5
  pour Bottom (no thermals): 202.56,5.08 205.42,7.94 215.74,7.94 216.22,8.41 216.22,20.48 216.85,20.48 216.85,3.49 208.76,3.49 208.76,6.03 207.8,6.99 205.74,6.99 204.79,6.03 204.79,4.45 204.31,3.97 202.72,3.97 202.56,4.13
+3V2  (via drill 0.6 pad 1.93)
  Top 0.406: 13.34,76.84 13.97,76.2 15.88,76.19 U3.8 17.34,76.2 20.32,76.2 | C38.2 27.09,73.4 24.29,76.2 20.32,76.2 | C45.+ 20.32,76.2
  Top 0.508: 83.5,104.14 85.95,104.14 IC8.2 86.3,105.55 D16.2 | 83.5,104.14 79.06,104.14 79.06,103.51 | C36.1 83.5,104.14 | 79.06,103.51 R79.2 75.78,102.45 74.61,101.28 73.03,101.28 72.07,100.33 72.07,94.62 | 79.06,103.51 C44.+ | 19.05,94.93 40.64,94.93 41.91,96.2 45.09,96.2 | R77.2 19.05,92.81 19.05,94.93 | 19.05,94.93 15.88,94.93 13.34,92.39 13.34,76.84 | IC7.6 55.65,96.52 53.34,96.52 53.34,97.47 | IC7.4 53.34,98.19 53.34,97.47 | 45.09,96.2 C40.+ 49.43,97.58 C37.2 51.54,97.47 53.34,97.47 | v45.09,93.98 45.09,96.2 | 72.07,94.62 L3.1 70.17,93.5 68.74,92.08 v67.31,92.08 | 72.07,94.62 72.61,94.62 C48.1
  Bottom 0.508: R80.2 30,103.99 35.24,98.74 35.24,91.44 39.69,87 43.18,87 46.99,90.81
  Bottom 0.813: 46.99,90.81 v45.09,93.98
  Bottom 1.016: 46.99,90.81 51.75,90.81 52.7,91.76 66.99,91.76 v67.31,92.08
  pour Top: 87.63,107.32 85.41,107.32 85.09,107 85.09,105.73 84.77,105.41 75.25,105.41 75.25,102.55 73.98,101.6 74.61,100.65 75.56,101.6 84.77,101.6 85.72,102.55 87,102.55 87.63,103.19
  pour Top: 49.21,98.58 43.66,98.58 41.12,96.04 29.05,96.04 28.57,95.57 28.57,94.62 28.89,94.3 40.16,94.3 41.59,95.73 43.81,95.73 44.13,95.41 44.13,93.66 44.77,93.03 45.88,93.03 46.67,93.82 46.67,95.09 49.85,97 49.85,97.95
  pour Bottom: 31.43,104.46 25.24,104.46 24.13,103.35 24.13,101.92 28.26,101.92 31.91,98.27 31.91,93.19 39.05,86.04 45.72,86.04 45.72,87.63 47.62,89.54 52.39,89.54 53.66,91.12 57.15,91.12 58.26,89.69 67.79,89.69 68.58,90.49 68.58,92.71 67.94,93.35 66.36,93.35 65.72,92.71 51.28,92.71 50.32,91.76 46.99,91.76 46.51,92.55 44.29,92.55 44.29,89.06 43.34,88.11 40.48,88.11 37.94,90.65 37.94,101.12 36.99,102.08 33.81,102.08
  pour Top (no thermals): 27.3,73.66 24.45,76.52 14.13,76.52 13.65,76.99 13.65,89.06 13.02,89.06 13.02,72.07 21.11,72.07 21.11,74.61 22.07,75.57 24.13,75.57 25.08,74.61 25.08,73.03 25.56,72.55 27.15,72.55 27.3,72.71
+3V3  (via drill 0.6 pad 1.93)
  Top 0.406: 13.34,8.25 13.97,7.62 15.88,7.61 U1.8 17.34,7.62 20.32,7.62 | C9.2 27.09,4.82 24.29,7.62 20.32,7.62 | C17.+ 20.32,7.62
  Top 0.508: 83.5,35.56 85.95,35.56 IC2.2 86.3,36.97 D2.2 | 83.5,35.56 79.06,35.56 79.06,34.92 | C4.1 83.5,35.56 | 79.06,34.92 R30.2 75.78,33.87 74.61,32.7 73.03,32.7 72.07,31.75 72.07,26.04 | 79.06,34.92 C16.+ | 19.05,26.35 40.64,26.35 41.91,27.62 45.09,27.62 | R18.2 19.05,24.23 19.05,26.35 | 19.05,26.35 15.88,26.35 13.34,23.81 13.34,8.25 | IC1.6 55.65,27.94 53.34,27.94 53.34,28.89 | IC1.4 53.34,29.61 53.34,28.89 | 45.09,27.62 C11.+ 49.43,28.99 C7.2 51.54,28.89 53.34,28.89 | v45.09,25.4 45.09,27.62 | 72.07,26.04 L1.1 70.17,24.92 68.74,23.49 v67.31,23.49 | 72.07,26.04 72.61,26.04 C20.1
  Bottom 0.508: R20.2 30,35.41 35.24,30.16 35.24,22.86 39.69,18.41 43.18,18.41 46.99,22.22
  Bottom 0.813: 46.99,22.22 v45.09,25.4
  Bottom 1.016: 46.99,22.22 51.75,22.22 52.7,23.18 66.99,23.18 v67.31,23.49
  pour Top: 87.63,38.73 85.41,38.73 85.09,38.42 85.09,37.15 84.77,36.83 75.25,36.83 75.25,33.97 73.98,33.02 74.61,32.07 75.56,33.02 84.77,33.02 85.72,33.97 87,33.97 87.63,34.61
  pour Top: 49.21,30 43.66,30 41.12,27.46 29.05,27.46 28.57,26.99 28.57,26.04 28.89,25.72 40.16,25.72 41.59,27.15 43.81,27.15 44.13,26.83 44.13,25.08 44.77,24.45 45.88,24.45 46.67,25.24 46.67,26.51 49.85,28.42 49.85,29.37
  pour Bottom: 31.43,35.88 25.24,35.88 24.13,34.77 24.13,33.34 28.26,33.34 31.91,29.69 31.91,24.61 39.05,17.46 45.72,17.46 45.72,19.05 47.62,20.95 52.39,20.95 53.66,22.54 57.15,22.54 58.26,21.11 67.79,21.11 68.58,21.91 68.58,24.13 67.94,24.77 66.36,24.77 65.72,24.13 51.28,24.13 50.32,23.18 46.99,23.18 46.51,23.97 44.29,23.97 44.29,20.48 43.34,19.53 40.48,19.53 37.94,22.07 37.94,32.54 36.99,33.5 33.81,33.5
  pour Top (no thermals): 27.3,5.08 24.45,7.94 14.13,7.94 13.65,8.41 13.65,20.48 13.02,20.48 13.02,3.49 21.11,3.49 21.11,6.03 22.07,6.99 24.13,6.99 25.08,6.03 25.08,4.45 25.56,3.97 27.15,3.97 27.3,4.13
+3V4  (via drill 0.6 pad 1.93)
  Top 0.508: R110.2 199.87,103.99 194.63,98.74 194.63,91.44 190.18,87 186.69,87 182.88,90.81
  Top 0.813: 182.88,90.81 v184.78,93.98
  Top 1.016: 182.88,90.81 178.12,90.81 177.16,91.76 162.88,91.76 v162.56,92.08
  Bottom 0.406: 216.53,76.84 215.9,76.2 214,76.19 U4.8 212.53,76.2 209.55,76.2 | C54.2 202.78,73.4 205.58,76.2 209.55,76.2 | C61.+ 209.55,76.2
  Bottom 0.508: 146.37,104.14 143.92,104.14 IC11.2 143.57,105.55 D23.2 | 146.37,104.14 150.81,104.14 150.81,103.51 | C52.1 146.37,104.14 | 150.81,103.51 R109.2 154.09,102.45 155.26,101.28 156.84,101.28 157.8,100.33 157.8,94.62 | 150.81,103.51 C60.+ | 210.82,94.93 189.23,94.93 187.96,96.2 184.78,96.2 | R107.2 210.82,92.81 210.82,94.93 | 210.82,94.93 214,94.93 216.53,92.39 216.53,76.84 | IC10.6 174.22,96.52 176.53,96.52 176.53,97.47 | IC10.4 176.53,98.19 176.53,97.47 | 184.78,96.2 C56.+ 180.44,97.58 C53.2 178.33,97.47 176.53,97.47 | v184.78,93.98 184.78,96.2 | 157.8,94.62 L4.1 159.7,93.5 161.13,92.08 v162.56,92.08 | 157.8,94.62 157.26,94.62 C64.1
  pour Bottom: 142.24,107.32 144.46,107.32 144.78,107 144.78,105.73 145.1,105.41 154.62,105.41 154.62,102.55 155.89,101.6 155.26,100.65 154.31,101.6 145.1,101.6 144.15,102.55 142.88,102.55 142.24,103.19
  pour Bottom: 180.66,98.58 186.21,98.58 188.75,96.04 200.82,96.04 201.29,95.57 201.29,94.62 200.98,94.3 189.71,94.3 188.28,95.73 186.06,95.73 185.74,95.41 185.74,93.66 185.1,93.03 183.99,93.03 183.2,93.82 183.2,95.09 180.02,97 180.02,97.95
  pour Top: 198.44,104.46 204.63,104.46 205.74,103.35 205.74,101.92 201.61,101.92 197.96,98.27 197.96,93.19 190.82,86.04 184.15,86.04 184.15,87.63 182.25,89.54 177.48,89.54 176.21,91.12 172.72,91.12 171.61,89.69 162.08,89.69 161.29,90.49 161.29,92.71 161.93,93.35 163.51,93.35 164.15,92.71 178.59,92.71 179.55,91.76 182.88,91.76 183.36,92.55 185.58,92.55 185.58,89.06 186.53,88.11 189.39,88.11 191.93,90.65 191.93,101.12 192.88,102.08 196.06,102.08
  pour Bottom (no thermals): 202.56,73.66 205.42,76.52 215.74,76.52 216.22,76.99 216.22,89.06 216.85,89.06 216.85,72.07 208.76,72.07 208.76,74.61 207.8,75.57 205.74,75.57 204.79,74.61 204.79,73.03 204.31,72.55 202.72,72.55 202.56,72.71
+5V  (via drill 0.6 pad 1.93)
  Top 0.508: IC3.2 92.08,51.21 92.08,52.07 89.22,52.07 | 89.22,52.07 84.45,52.07 84.45,50.8 | D1.2 92.02,51.57 | 84.45,50.52 C14.+ 84.45,50.8 | 84.45,50.8 82.55,50.8 77.47,45.72 v77.47,41.91 | 89.22,49.23 89.22,52.07
  Top 0.813: 92.02,51.57 IC3.2
  Bottom 0.406: 66.36,42.86 76.52,42.86 v77.47,41.91 78.11,42.55 103.5,42.55 107.31,38.73 107.31,5.71 104.14,2.54 68.58,2.54 67.07,4.05 66.67,4.45 | R19.2 66.36,42.86 | R21.2 22.54,34.08 22.54,35.88 23.5,36.83 29.84,36.83 30.8,37.78 30.8,41.27 31.43,41.91 38.73,41.91 40.01,43.18 66.36,42.86
  Bottom 1.016: JP1.TIP 63.42,7.7 67.07,4.05
  pour Top: 93.98,54.61 80.01,54.61 78.74,53.34 78.74,53.02 arc-90 73.98,46.99 73.98,41.59 74.61,40.96 79.06,40.96 79.06,45.09 82.87,48.89 93.03,48.89 93.98,49.85
  pour Bottom: 62.55,10.64 62.55,1.59 110.65,1.43 110.65,42.39 107.16,45.88 74.93,45.88 73.34,47.47 arc-90 69.06,51.75 69.06,52.55 68.58,53.02 65.88,53.02 66.04,52.55 66.04,45.88 64.77,44.61 40.32,44.61 39.53,43.81 37.78,43.81 37.15,43.18 37.15,42.55 36.67,42.07 31.11,42.07 30,40.96 30,39.85 29.53,39.37 28.73,39.37 28.1,38.73 28.1,37.46 27.62,36.99 23.18,36.99 21.91,35.72 21.91,33.34 23.34,33.34 23.34,35.08 25.08,36.83 30,36.83 30.96,37.78 30.96,41.12 31.59,41.75 36.67,41.75 36.99,41.43 36.99,39.21 37.31,38.89 40.96,38.89 42.23,40.16 49.69,40.16 51.75,42.39 72.07,42.39 74.77,39.69 91.12,39.69 93.19,41.75 103.03,41.75 106.2,38.58 106.2,6.35 105.09,5.24 69.53,5.24 67.15,7.62 67.15,9.05 65.56,10.64
+5V1  (via drill 0.6 pad 1.93)
  Top 0.406: 163.51,42.86 153.35,42.86 v152.4,41.91 151.76,42.55 126.36,42.55 122.56,38.73 122.56,5.71 125.73,2.54 161.29,2.54 162.8,4.05 163.19,4.45 | R48.2 163.51,42.86 | R52.2 207.33,34.08 207.33,35.88 206.38,36.83 200.03,36.83 199.07,37.78 199.07,41.27 198.44,41.91 191.13,41.91 189.87,43.18 163.51,42.86
  Top 1.016: JP2.TIP 166.45,7.7 162.8,4.05
  Bottom 0.508: IC6.2 137.79,51.21 137.79,52.07 140.65,52.07 | 140.65,52.07 145.41,52.07 145.41,50.8 | D8.2 137.85,51.57 | 145.41,50.52 C26.+ 145.41,50.8 | 145.41,50.8 147.32,50.8 152.4,45.72 v152.4,41.91 | 140.65,49.23 140.65,52.07
  Bottom 0.813: 137.85,51.57 IC6.2
  pour Bottom: 135.89,54.61 149.86,54.61 151.13,53.34 151.13,53.02 arc90 155.89,46.99 155.89,41.59 155.26,40.96 150.81,40.96 150.81,45.09 147,48.89 136.84,48.89 135.89,49.85
  pour Top: 167.32,10.64 167.32,1.59 119.22,1.43 119.22,42.39 122.71,45.88 154.94,45.88 156.53,47.47 arc90 160.81,51.75 160.81,52.55 161.29,53.02 163.99,53.02 163.83,52.55 163.83,45.88 165.1,44.61 189.55,44.61 190.34,43.81 192.09,43.81 192.72,43.18 192.72,42.55 193.2,42.07 198.75,42.07 199.87,40.96 199.87,39.85 200.34,39.37 201.14,39.37 201.77,38.73 201.77,37.46 202.25,36.99 206.69,36.99 207.96,35.72 207.96,33.34 206.53,33.34 206.53,35.08 204.79,36.83 199.87,36.83 198.91,37.78 198.91,41.12 198.28,41.75 193.2,41.75 192.88,41.43 192.88,39.21 192.56,38.89 188.91,38.89 187.64,40.16 180.18,40.16 178.12,42.39 157.8,42.39 155.1,39.69 138.75,39.69 136.68,41.75 126.84,41.75 123.67,38.58 123.67,6.35 124.78,5.24 160.34,5.24 162.72,7.62 162.72,9.05 164.31,10.64
+5V2  (via drill 0.6 pad 1.93)
  Top 0.508: IC9.2 92.08,119.79 92.08,120.65 89.22,120.65 | 89.22,120.65 84.45,120.65 84.45,119.38 | D15.2 92.02,120.16 | 84.45,119.1 C42.+ 84.45,119.38 | 84.45,119.38 82.55,119.38 77.47,114.3 v77.47,110.49 | 89.22,117.81 89.22,120.65
  Top 0.813: 92.02,120.16 IC9.2
  Bottom 0.406: 66.36,111.44 76.52,111.44 v77.47,110.49 78.11,111.12 103.5,111.12 107.31,107.32 107.31,74.3 104.14,71.12 68.58,71.12 67.07,72.63 66.67,73.03 | R78.2 66.36,111.44 | R82.2 22.54,102.66 22.54,104.46 23.5,105.41 29.84,105.41 30.8,106.36 30.8,109.86 31.43,110.49 38.73,110.49 40.01,111.76 66.36,111.44
  Bottom 1.016: JP5.TIP 63.42,76.28 67.07,72.63
  pour Top: 93.98,123.19 80.01,123.19 78.74,121.92 78.74,121.6 arc-90 73.98,115.57 73.98,110.17 74.61,109.54 79.06,109.54 79.06,113.67 82.87,117.48 93.03,117.48 93.98,118.43
  pour Bottom: 62.55,79.22 62.55,70.17 110.65,70.01 110.65,110.97 107.16,114.46 74.93,114.46 73.34,116.05 arc-90 69.06,120.33 69.06,121.13 68.58,121.6 65.88,121.6 66.04,121.13 66.04,114.46 64.77,113.19 40.32,113.19 39.53,112.4 37.78,112.4 37.15,111.76 37.15,111.12 36.67,110.65 31.11,110.65 30,109.54 30,108.43 29.53,107.95 28.73,107.95 28.1,107.32 28.1,106.05 27.62,105.57 23.18,105.57 21.91,104.3 21.91,101.92 23.34,101.92 23.34,103.66 25.08,105.41 30,105.41 30.96,106.36 30.96,109.7 31.59,110.33 36.67,110.33 36.99,110.01 36.99,107.79 37.31,107.47 40.96,107.47 42.23,108.74 49.69,108.74 51.75,110.97 72.07,110.97 74.77,108.27 91.12,108.27 93.19,110.33 103.03,110.33 106.2,107.16 106.2,74.93 105.09,73.82 69.53,73.82 67.15,76.2 67.15,77.63 65.56,79.22
+5V3  (via drill 0.6 pad 1.93)
  Top 0.406: 163.51,111.44 153.35,111.44 v152.4,110.49 151.76,111.12 126.36,111.12 122.56,107.32 122.56,74.3 125.73,71.12 161.29,71.12 162.8,72.63 163.19,73.03 | R108.2 163.51,111.44 | R112.2 207.33,102.66 207.33,104.46 206.38,105.41 200.03,105.41 199.07,106.36 199.07,109.86 198.44,110.49 191.13,110.49 189.87,111.76 163.51,111.44
  Top 1.016: JP7.TIP 166.45,76.28 162.8,72.63
  Bottom 0.508: IC12.2 137.79,119.79 137.79,120.65 140.65,120.65 | 140.65,120.65 145.41,120.65 145.41,119.38 | D22.2 137.85,120.16 | 145.41,119.1 C58.+ 145.41,119.38 | 145.41,119.38 147.32,119.38 152.4,114.3 v152.4,110.49 | 140.65,117.81 140.65,120.65
  Bottom 0.813: 137.85,120.16 IC12.2
  pour Bottom: 135.89,123.19 149.86,123.19 151.13,121.92 151.13,121.6 arc90 155.89,115.57 155.89,110.17 155.26,109.54 150.81,109.54 150.81,113.67 147,117.48 136.84,117.48 135.89,118.43
  pour Top: 167.32,79.22 167.32,70.17 119.22,70.01 119.22,110.97 122.71,114.46 154.94,114.46 156.53,116.05 arc90 160.81,120.33 160.81,121.13 161.29,121.6 163.99,121.6 163.83,121.13 163.83,114.46 165.1,113.19 189.55,113.19 190.34,112.4 192.09,112.4 192.72,111.76 192.72,111.12 193.2,110.65 198.75,110.65 199.87,109.54 199.87,108.43 200.34,107.95 201.14,107.95 201.77,107.32 201.77,106.05 202.25,105.57 206.69,105.57 207.96,104.3 207.96,101.92 206.53,101.92 206.53,103.66 204.79,105.41 199.87,105.41 198.91,106.36 198.91,109.7 198.28,110.33 193.2,110.33 192.88,110.01 192.88,107.79 192.56,107.47 188.91,107.47 187.64,108.74 180.18,108.74 178.12,110.97 157.8,110.97 155.1,108.27 138.75,108.27 136.68,110.33 126.84,110.33 123.67,107.16 123.67,74.93 124.78,73.82 160.34,73.82 162.72,76.2 162.72,77.63 164.31,79.22
ADC
  Top 0.508: R13.1 R14.2 80.54,38.42 75.56,38.42 74.4,37.25 70.91,37.25 69.53,35.88 69.53,33.66 70.8,32.38 70.8,28.57 69.85,27.62 67.94,27.62 67.63,27.94 64.37,27.94 IC1.19
ADC1
  Bottom 0.508: R42.1 R43.2 149.33,38.42 154.31,38.42 155.47,37.25 158.97,37.25 160.34,35.88 160.34,33.66 159.07,32.38 159.07,28.57 160.02,27.62 161.93,27.62 162.24,27.94 165.5,27.94 IC4.19
ADC2
  Top 0.508: R72.1 R73.2 80.54,107 75.56,107 74.4,105.83 70.91,105.83 69.53,104.46 69.53,102.23 70.8,100.97 70.8,97.16 69.85,96.2 67.94,96.2 67.63,96.52 64.37,96.52 IC7.19
ADC3
  Bottom 0.508: R102.1 R103.2 149.33,107 154.31,107 155.47,105.83 158.97,105.83 160.34,104.46 160.34,102.23 159.07,100.97 159.07,97.16 160.02,96.2 161.93,96.2 162.24,96.52 165.5,96.52 IC10.19
DIO0
  Top 0.508: IC1.1 53.08,32.01
  Top 0.61: 53.08,32.01 51.91,33.18 26.99,33.18 26.36,33.18 R24.1
  Top 0.813: R24.1 24.12,30.79 24.13,30.8
DIO1
  Bottom 0.508: IC4.1 176.79,32.01
  Bottom 0.61: 176.79,32.01 177.96,33.18 203.51,33.18 R59.1
  Bottom 0.813: R59.1 205.75,30.79 205.74,30.8
DIO2
  Top 0.508: IC7.1 53.08,100.59
  Top 0.61: 53.08,100.59 51.91,101.76 26.99,101.76 26.36,101.76 R89.1
  Top 0.813: R89.1 24.12,99.37 24.13,99.38
DIO3
  Bottom 0.508: IC10.1 176.79,100.59
  Bottom 0.61: 176.79,100.59 177.96,101.76 203.51,101.76 R119.1
  Bottom 0.813: R119.1 205.75,99.37 205.74,99.38
GND  (via drill 0.6 pad 1.68, 0.6 pad 1.93)
  Top 0.406: U1.11 35.84,11.43 33.34,11.43 32.38,10.48 | v27.62,29.37 20.27,29.37 D7.A | 32.38,10.48 27.62,15.24 v27.62,24.13 | 32.38,7.61 U1.9 | 32.38,7.61 31.63,7.61 C9.1 28.79,3.55 28.26,3.02 23.5,3.02 22.86,3.65 C17.- | 32.38,7.61 32.38,10.48
  Top 0.508: 93.98,27.3 98.11,27.3 C15.- | 93.98,27.3 93.66,27.3 | 93.66,27.3 89.89,27.3 IC2.3 | v93.98,25.08 93.98,27.3 | C3.2 93.66,27.3 | C16.- 79.06,28.5 | 79.06,28.5 83.5,28.5 | 83.5,28.5 87.86,28.5 | C4.2 83.5,28.5 | C13.- 103.5,44.45 102.91,43.85 99.38,43.85 | 99.38,43.85 IC3.3 | C1.2 99.38,43.85 | 93.98,43.54 93.98,43.81 89.22,43.81 | 89.22,43.81 85.09,43.81 | 85.09,43.81 84.45,44.45 C14.- | C2.2 89.22,43.81 | 85.09,43.81 81.92,43.81 80.96,42.86 80.96,40.54 R14.1 74.03,40.22 | v80.17,7.78 83.98,7.78 84.14,7.94 | FDV303N2.2 71.18,45.66 73.03,43.81 73.03,41.23 74.03,40.22 | 60.01,29.53 59.12,30.41 IC1.3 51.72,30.41 C7.1 50.86,31.43 C11.- | 60.01,29.53 60.09,29.61 IC1.21 66.12,29.61 67.53,31.01 C19.2 68.26,31.01 68.26,36.83 69.85,38.42 72.23,38.42 74.03,40.22 | IC1.5 60.01,28.81 60.01,29.53 | C20.2 78.4,27.84 79.06,28.5
  Top 0.813: 86.49,28.27 87.86,28.5 IC2.3 | 95.82,43.85 IC3.3 93.98,43.54 v93.98,39.37 | 104.14,13.65 105.09,14.61 | 105.09,14.61 105.09,20.64 103.5,22.22 103.5,27.3 | 84.14,7.94 84.14,7.3 85.72,5.71 103.82,5.71 105.09,6.99 105.09,14.61
  Top 1.27: 104.14,13.65 99.06,13.65 97.79,14.92 97.79,18.1 96.52,19.37 96.52,19.8 D5.A | U$1.P$NEG 103.5,27.3 98.11,27.3 | D3.A 103.5,22.22 | D6.A 86.16,15.67 84.14,13.65 84.14,7.94
  Bottom 0.406: SV2.7 SV2.9 SV2.10 33.02,54.61 22.86,54.61 20.95,52.7 SV3.1 SV3.3 SV3.5 16.83,42.86 C18.- 16.09,35.46 C10.2 7.72,35.46 | U$2.4 U$2.6 U$2.8 U$2.10 87,6.35 | 87,6.35 104.14,6.35 104.78,6.99 104.78,23.49 102.23,26.04 93.98,26.04 | 68.42,9.84 68.58,7.94 70.17,6.35 87,6.35 | TSOP.GND 6.35,35.56 3.81,33.02 3.81,24.13 6.03,21.91 25.4,21.91 v27.62,24.13 v27.62,29.37
  Bottom 0.508: FDV303N1.2 58.36,15.3 61.75,11.91 66.2,11.91 68.42,9.84
  Bottom 0.61: 7.72,35.46 TSOP.GND
  Bottom 0.813: v93.98,39.37 93.98,26.04 v93.98,25.08 93.98,23.65
  Bottom 1.27: D5.A 96.31,21.32 93.98,23.65 | v93.98,25.08 v96.36,25.08 v98.9,25.08
  other vias: 16.67,40.01 32.07,4.29
  pour Top: 73.98,28.26 73.98,30.16 74.93,31.11 81.28,31.11 82.23,32.07 95.89,32.07 97.16,30.8 101.6,30.8 102.23,30.16 111.76,30.16 111.76,0.48 80.49,0.48 80.49,7.62 67.94,7.62 67.94,0.95 65.25,0.95 65.25,13.49 67.15,13.49 70.33,16.67 78.26,16.67 78.9,16.03 78.9,10.48 80.33,9.05 88.27,9.05 88.27,7.62 89.69,6.19 101.28,6.19 103.35,8.25 103.35,20.48 102.71,21.11 101.6,21.11 101.12,21.59 101.12,23.18 100.49,23.81 76.2,23.81 76.2,27.94 75.56,27.94
  pour Top: 104.78,47.62 83.82,47.62 80.01,43.81 80.01,39.69 81.28,39.69 81.28,41.59 82.23,42.55 89.22,42.55 91.76,40.01 92.39,40.01 93.03,39.37 93.03,38.73 93.34,38.42 94.61,38.42 94.93,38.73 94.93,39.37 95.57,40.01 96.52,40.01 99.69,43.18 105.09,43.18 105.41,43.5 105.41,46.99
  pour Top (no thermals): 32.23,12.07 37.94,12.07 38.26,11.75 38.26,11.27 38.1,11.11 33.34,11.11 32.86,10.64 32.86,8.41 33.18,8.1 38.42,8.1 38.42,0.79 22.07,0.79 22.07,5.56 22.54,6.03 23.81,6.03 24.29,5.56 24.29,3.97 25.08,3.17 27.78,3.17 28.42,3.81 28.42,5.87 24.92,9.37 25.08,20.16 25.08,24.45 25.72,25.08 31.43,25.08 32.23,24.13
  pour Top: 49.85,31.75 49.37,32.23 27.62,32.23 26.51,31.11 26.51,28.89 26.83,28.57 40.48,28.57 43.02,31.11 49.53,31.11 49.85,31.43
  pour Top (isolate 0.305): 38.1,60.48 1.27,60.48 1.27,0.79 21.91,0.79 21.91,2.86 12.06,2.86 12.06,19.05 10.64,20.48 10.64,30 13.65,33.02 13.65,35.72 15.72,37.78 18.89,37.78 20.95,39.85 44.61,39.85 45.56,38.89 45.56,37.78 48.1,35.24 52.7,35.24 49.37,38.58 49.37,42.39 48.74,43.02 38.26,43.02 36.2,45.09 36.2,48.58 33.81,50.96 33.81,54.77 35.4,56.36 37.94,56.36 38.1,56.52
  pour Bottom: 39.69,61.44 0.95,61.44 0.95,0.95 51.12,0.95 51.12,11.27 48.74,13.65 48.74,16.35 38.58,16.35 30.64,24.29 30.64,29.21 27.46,32.38 23.02,32.38 21.11,30.48 15.4,30.48 15.4,26.99 14.29,25.88 6.67,25.88 5.24,27.3 5.24,33.97 6.35,35.08 12.86,35.08 13.18,35.4 17.3,35.4 17.78,35.88 21.11,35.88 21.11,36.83 20.16,37.78 20.16,43.02 21.75,44.61 21.75,53.18 22.38,53.82 26.99,53.82 30.96,49.85 30.96,48.1 31.11,47.94 36.99,47.94 36.99,52.55 37.62,53.18 39.05,53.18 39.69,53.82
  pour Bottom: 91.44,38.42 73.66,38.42 73.66,28.42 75.41,26.67 89.53,26.67 95.57,20.8 95.57,19.37 97,17.94 97,13.97 97.47,13.49 99.38,13.49 99.85,13.97 99.85,17.3 100.49,17.94 102.71,17.94 103.35,17.3 103.35,8.1 102.23,6.99 96.04,6.99 95.57,7.46 95.57,9.05 95.09,9.53 79.85,9.53 78.9,10.48 78.9,12.07 79.69,12.86 86.68,12.86 87.63,13.81 87.63,17.14 88.58,18.1 90.96,18.1 90.96,20.64 87.95,23.65 78.42,23.65 72.23,17.94 53.18,17.94 52.55,17.3 52.55,15.24 53.82,13.97 58.1,13.97 60.48,11.59 66.2,11.59 68.26,9.53 68.26,7.94 70.01,6.19 104.46,6.19 105.09,6.83 105.09,38.58 103.5,40.16 103.5,35.72 98.27,35.72 98.27,40.64 93.66,40.64
GND1  (via drill 0.6 pad 1.68, 0.6 pad 1.93)
  Top 0.406: SV1.7 SV1.9 SV1.10 196.85,54.61 207.01,54.61 208.91,52.7 SV4.1 SV4.3 SV4.5 213.04,42.86 C30.- 213.78,35.46 C23.2 222.15,35.46 | U$6.4 U$6.6 U$6.8 U$6.10 142.88,6.35 | 142.88,6.35 125.73,6.35 125.09,6.99 125.09,23.49 127.64,26.04 135.89,26.04 | 161.45,9.84 161.29,7.94 159.7,6.35 142.88,6.35 | TSOP1.GND 223.52,35.56 226.06,33.02 226.06,24.13 223.84,21.91 204.47,21.91 v202.25,24.13 v202.25,29.37
  Top 0.508: FDV303N3.2 171.51,15.3 168.12,11.91 163.67,11.91 161.45,9.84
  Top 0.61: 222.15,35.46 TSOP1.GND
  Top 0.813: v135.89,39.37 135.89,26.04 v135.89,25.08 135.89,23.65
  Top 1.27: D12.A 133.56,21.32 135.89,23.65 | v135.89,25.08 v133.51,25.08 v130.97,25.08
  Bottom 0.406: U2.11 194.03,11.43 196.53,11.43 197.49,10.48 | v202.25,29.37 209.6,29.37 D14.A | 197.49,10.48 202.25,15.24 v202.25,24.13 | 197.49,7.61 U2.9 | 197.49,7.61 198.24,7.61 C22.1 201.08,3.55 201.61,3.02 206.38,3.02 207.01,3.65 C29.- | 197.49,7.61 197.49,10.48
  Bottom 0.508: 135.89,27.3 131.76,27.3 C27.- | 135.89,27.3 136.21,27.3 | 136.21,27.3 139.98,27.3 IC5.3 | v135.89,25.08 135.89,27.3 | C8.2 136.21,27.3 | C28.- 150.81,28.5 | 150.81,28.5 146.37,28.5 | 146.37,28.5 142.01,28.5 | C12.2 146.37,28.5 | C25.- 126.36,44.45 126.96,43.85 130.49,43.85 | 130.49,43.85 IC6.3 | C5.2 130.49,43.85 | 135.89,43.54 135.89,43.81 140.65,43.81 | 140.65,43.81 144.78,43.81 | 144.78,43.81 145.41,44.45 C26.- | C6.2 140.65,43.81 | 144.78,43.81 147.96,43.81 148.91,42.86 148.91,40.54 R43.1 155.84,40.22 | v149.7,7.78 145.89,7.78 145.73,7.94 | FDV303N4.2 158.69,45.66 156.84,43.81 156.84,41.23 155.84,40.22 | 169.86,29.53 170.75,30.41 IC4.3 178.15,30.41 C21.1 179.01,31.43 C24.- | 169.86,29.53 169.78,29.61 IC4.21 163.75,29.61 162.34,31.01 C31.2 161.61,31.01 161.61,36.83 160.02,38.42 157.64,38.42 155.84,40.22 | IC4.5 169.86,28.81 169.86,29.53 | C32.2 151.47,27.84 150.81,28.5
  Bottom 0.813: 143.38,28.27 142.01,28.5 IC5.3 | 134.05,43.85 IC6.3 135.89,43.54 v135.89,39.37 | 125.73,13.65 124.78,14.61 | 124.78,14.61 124.78,20.64 126.36,22.22 126.36,27.3 | 145.73,7.94 145.73,7.3 144.15,5.71 126.05,5.71 124.78,6.99 124.78,14.61
  Bottom 1.27: 125.73,13.65 130.81,13.65 132.08,14.92 132.08,18.1 133.35,19.37 133.35,19.8 D12.A | U$5.P$NEG 126.36,27.3 131.76,27.3 | D10.A 126.36,22.22 | D13.A 143.72,15.67 145.73,13.65 145.73,7.94
  other vias: 213.2,40.01 197.8,4.29
  pour Bottom: 155.89,28.26 155.89,30.16 154.94,31.11 148.59,31.11 147.64,32.07 133.99,32.07 132.72,30.8 128.27,30.8 127.64,30.16 118.11,30.16 118.11,0.48 149.38,0.48 149.38,7.62 161.93,7.62 161.93,0.95 164.62,0.95 164.62,13.49 162.72,13.49 159.54,16.67 151.61,16.67 150.97,16.03 150.97,10.48 149.54,9.05 141.6,9.05 141.6,7.62 140.18,6.19 128.59,6.19 126.52,8.25 126.52,20.48 127.16,21.11 128.27,21.11 128.75,21.59 128.75,23.18 129.38,23.81 153.67,23.81 153.67,27.94 154.31,27.94
  pour Bottom: 125.09,47.62 146.05,47.62 149.86,43.81 149.86,39.69 148.59,39.69 148.59,41.59 147.64,42.55 140.65,42.55 138.11,40.01 137.48,40.01 136.84,39.37 136.84,38.73 136.53,38.42 135.25,38.42 134.94,38.73 134.94,39.37 134.3,40.01 133.35,40.01 130.18,43.18 124.78,43.18 124.46,43.5 124.46,46.99
  pour Bottom (no thermals): 197.64,12.07 191.93,12.07 191.61,11.75 191.61,11.27 191.77,11.11 196.53,11.11 197.01,10.64 197.01,8.41 196.69,8.1 191.45,8.1 191.45,0.79 207.8,0.79 207.8,5.56 207.33,6.03 206.06,6.03 205.58,5.56 205.58,3.97 204.79,3.17 202.09,3.17 201.45,3.81 201.45,5.87 204.95,9.37 204.79,20.16 204.79,24.45 204.15,25.08 198.44,25.08 197.64,24.13
  pour Bottom: 180.02,31.75 180.5,32.23 202.25,32.23 203.36,31.11 203.36,28.89 203.04,28.57 189.39,28.57 186.85,31.11 180.34,31.11 180.02,31.43
  pour Bottom (isolate 0.305): 191.77,60.48 228.6,60.48 228.6,0.79 207.96,0.79 207.96,2.86 217.81,2.86 217.81,19.05 219.23,20.48 219.23,30 216.22,33.02 216.22,35.72 214.15,37.78 210.98,37.78 208.91,39.85 185.26,39.85 184.31,38.89 184.31,37.78 181.77,35.24 177.16,35.24 180.5,38.58 180.5,42.39 181.13,43.02 191.61,43.02 193.68,45.09 193.68,48.58 196.06,50.96 196.06,54.77 194.47,56.36 191.93,56.36 191.77,56.52
  pour Top: 190.18,61.44 228.92,61.44 228.92,0.95 178.75,0.95 178.75,11.27 181.13,13.65 181.13,16.35 191.29,16.35 199.23,24.29 199.23,29.21 202.41,32.38 206.85,32.38 208.76,30.48 214.47,30.48 214.47,26.99 215.58,25.88 223.2,25.88 224.63,27.3 224.63,33.97 223.52,35.08 217.01,35.08 216.69,35.4 212.57,35.4 212.09,35.88 208.76,35.88 208.76,36.83 209.71,37.78 209.71,43.02 208.12,44.61 208.12,53.18 207.49,53.82 202.88,53.82 198.91,49.85 198.91,48.1 198.75,47.94 192.88,47.94 192.88,52.55 192.25,53.18 190.82,53.18 190.18,53.82
  pour Top: 138.43,38.42 156.21,38.42 156.21,28.42 154.46,26.67 140.34,26.67 134.3,20.8 134.3,19.37 132.87,17.94 132.87,13.97 132.4,13.49 130.49,13.49 130.02,13.97 130.02,17.3 129.38,17.94 127.16,17.94 126.52,17.3 126.52,8.1 127.64,6.99 133.83,6.99 134.3,7.46 134.3,9.05 134.78,9.53 150.02,9.53 150.97,10.48 150.97,12.07 150.18,12.86 143.19,12.86 142.24,13.81 142.24,17.14 141.29,18.1 138.91,18.1 138.91,20.64 141.92,23.65 151.45,23.65 157.64,17.94 176.69,17.94 177.32,17.3 177.32,15.24 176.05,13.97 171.77,13.97 169.39,11.59 163.67,11.59 161.61,9.53 161.61,7.94 159.86,6.19 125.41,6.19 124.78,6.83 124.78,38.58 126.36,40.16 126.36,35.72 131.6,35.72 131.6,40.64 136.21,40.64
GND2  (via drill 0.6 pad 1.68, 0.6 pad 1.93)